# Altium PCB Pixel1.0_2.PcbDoc
Units mm, origin at the board's own origin, x right, y up, seen from the top; angles counter-clockwise.
Board outline 20.38 x 15.25 mm, 4 copper layers (Top, Route2, Route3, Bottom), stack 0.978 mm thick; 82 components, 63 nets, 251 pads, 127 vias.
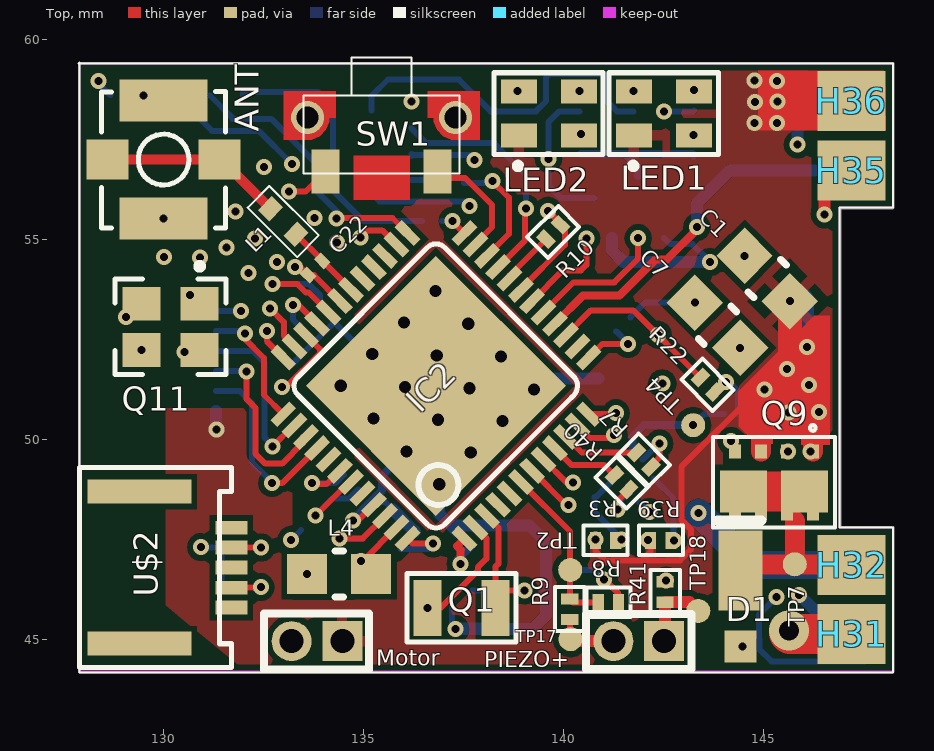
[diagram p0: Top view]
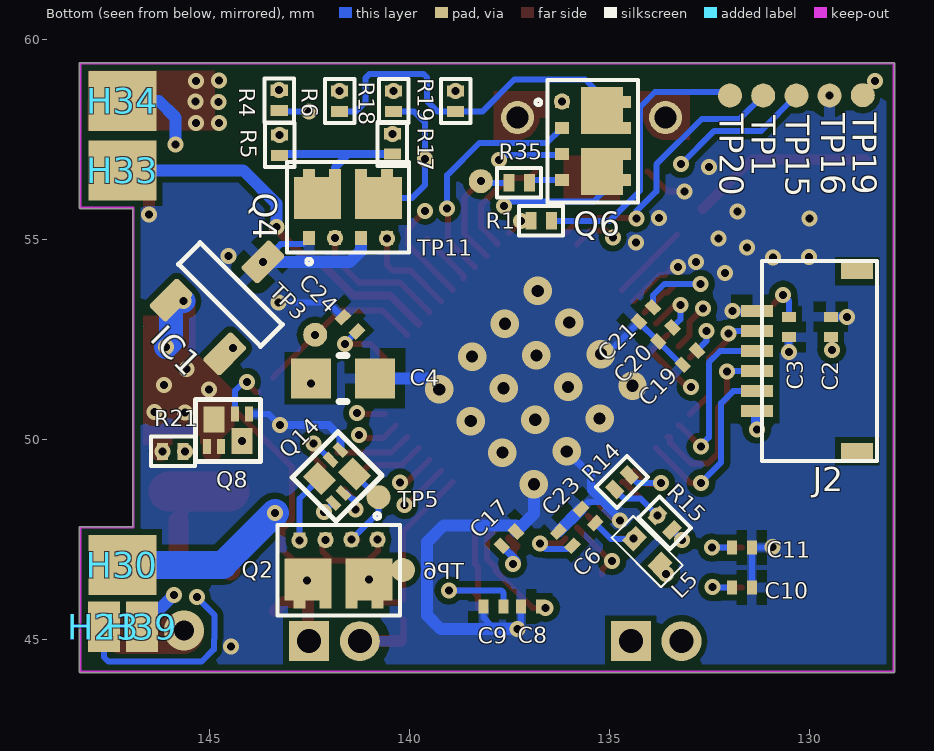
[diagram p1: Bottom view, seen from below]
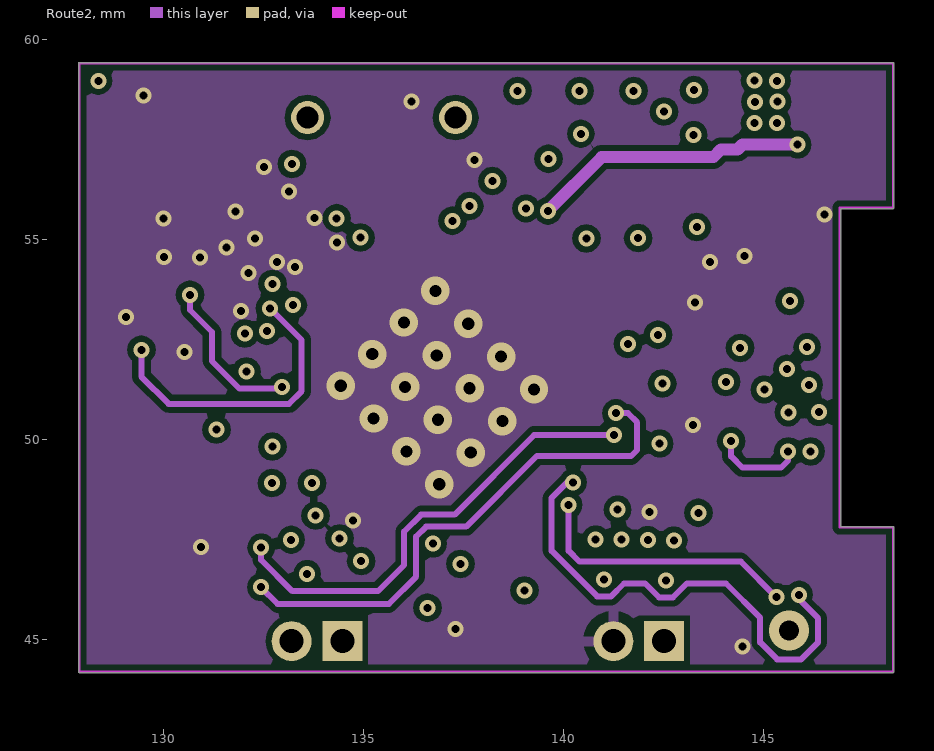
[diagram p2: Route2]
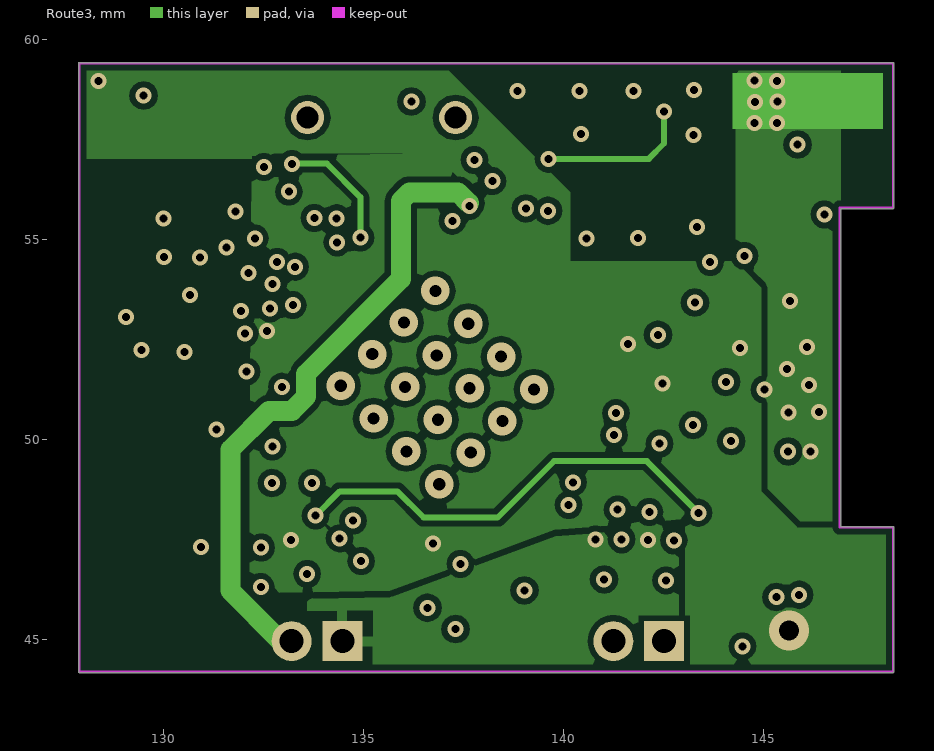
[diagram p3: Route3]
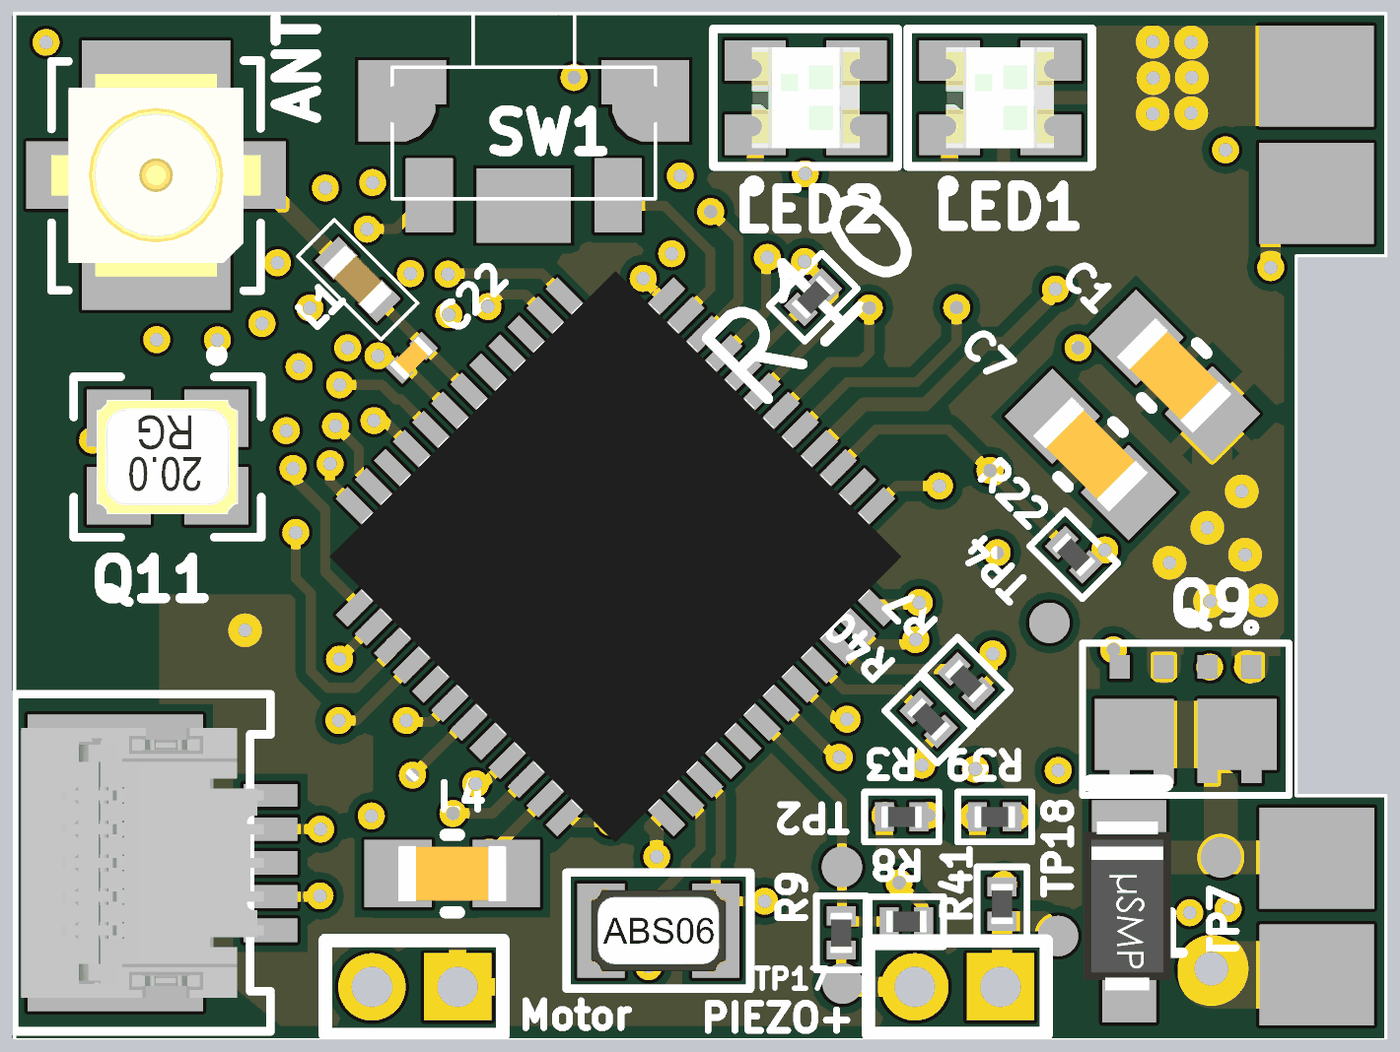
[diagram p4: 3D render of the assembled board from above, using the file's embedded part models]
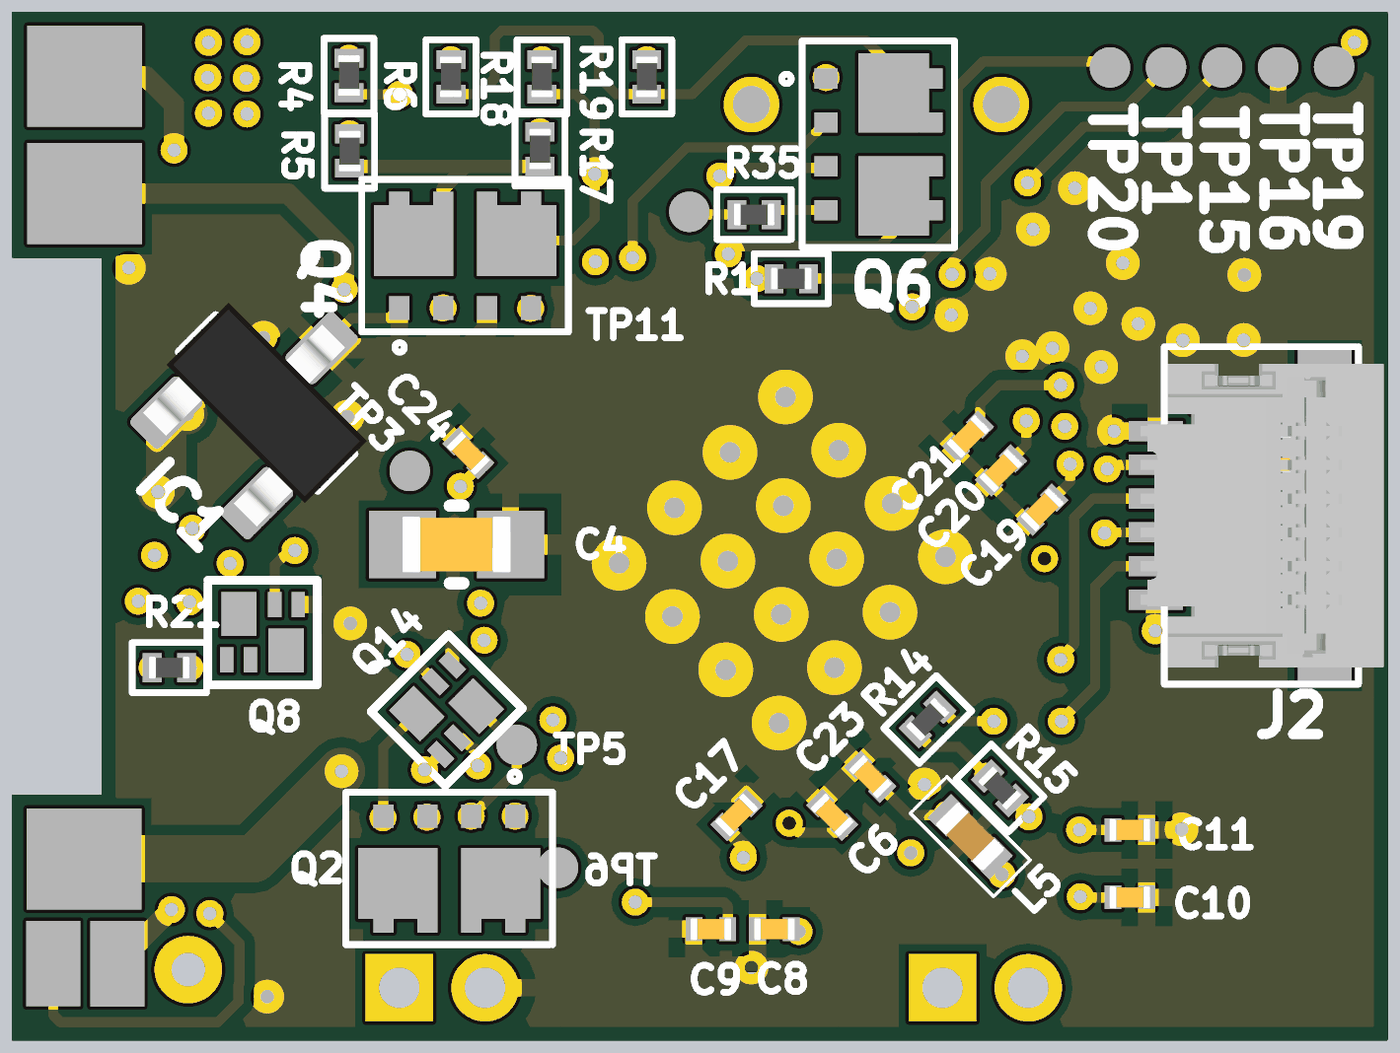
[diagram p5: 3D render of the assembled board from below, using the file's embedded part models]

## Layer stack, top to bottom
Top Solder: solder mask 0.0102, Solder Resist, Dk 3.5
Top: signal copper 0.0356
Dielectric 1: core 0.354, FR-4, Dk 4.2
Route2: signal copper 0.0356
Dielectric 2: prepreg 0.127, FR-4, Dk 4.2
Route3: signal copper 0.036
Dielectric 3: core 0.354, FR-4, Dk 4.2
Bottom: signal copper 0.0356
Bottom Solder: solder mask 0.0102, Solder Resist, Dk 3.5

## Board outline
127.874,44.2 127.874,59.4 cw(c127.9,59.4) 127.902,59.426 148.228,59.426 cw(c148.23,59.4) 148.256,59.4 148.256,55.8 cw(c148.23,55.8) 148.23,55.774 146.926,55.774 146.926,47.826 148.2,47.826 cw(c148.2,47.8) 148.215,47.821 cw(c148.23,47.8) 148.256,47.8 148.256,44.2 cw(c148.23,44.2) 148.228,44.174 127.902,44.174 cw(c127.9,44.2)

## Design rules (kind name [scope] priority, off if disabled: settings)
Clearance [All] p1: gap=0.15
ComponentClearance [All] p1 off: gap=0.2 collisioncheckmode=3 verticalgap=0.2 showdistances=FALSE
HoleSize [All] p1: absolutevalues=TRUE maxlimit=5 minlimit=0.025 maxpercent=80.000 minpercent=20.000
HoleToHoleClearance mdViaViaSameLayer [All] p1: gap=0.203 allowstackedmicrovias=TRUE
HoleToHoleClearance [All] p2: gap=0.254 allowstackedmicrovias=TRUE
MinimumSolderMaskSliver [All] p1 off: minsoldermaskwidth=0.254
NetAntennae [All] p1 off: netantennaetolerance=0
PlaneClearance [All] p1: clearance=0.254
PolygonConnect ThermalVias [IsVia] p1: connectstyle=Direct reliefconductorwidth=0.254 reliefentries=4 polygonreliefangle="90 Angle" airgapwidth=0.254
PolygonConnect [All] p2: connectstyle=Relief reliefconductorwidth=0.254 reliefentries=4 polygonreliefangle="90 Angle" airgapwidth=0.254
RoutingVias [All] p1: holewidth=0.2 width=0.4 viastyle="Through Hole" minholewidth=0.2 minwidth=0.4 maxholewidth=3 maxwidth=5
ShortCircuit [All] p1 off: allowed=FALSE
SilkToBoardRegionClearance [All] p1 off:
SilkToSilkClearance [All] p1 off: silktosilkclearance=0.254
SilkToSolderMaskClearance [IsPad] p1 off: minsilkscreentomaskgap=0.254 clearancetoexposedcopper=TRUE
SolderMaskExpansion via [isvia] p1: expansion=0 soldermaskfromhole=TRUE
SolderMaskExpansion [All] p2: expansion=0.05
Width [All] p1: maxlimit=3 minlimit=0.1 preferedwidth=0.15
20 further rules are at their usual default settings.

## Classes and differential pairs
component class Pixel1.0_0: ANT C2 C3 C6 C8 C9 C10 C11 C17 C19 C20 C21 C22 C23 C24 IC2 J2 L1 L4 L5 Q1 Q11 R1 TP1 TP15 TP16 TP19 TP20 U$2
component class Pixel1.0_2: C1 C4 C7 D1 H23 H30 H31 H32 H33 H34 H35 H36 H39 IC1 LED1 LED2 Motor PIEZO+ Q2 Q4 Q6 Q8 Q9 Q14 R3 R4 R5 R6 R7 R8 R9 R10 R14 R15 R17 R18 R19 R21 R22 R35 R39 R40 R41 SW1 TP2 TP3 TP4 TP5 TP6 TP7 TP11 TP17 TP18

## Components (designator, comment, footprint, x,y, rotation, side; value= is the part's Value field where it differs from the comment)
ANT "U.FL" U.FL 130,57 r90 top locked
C1 "1u" C0603 145.088,54.028 r315 top
C2 "12p" C0201 129.47,52.82 r90 bottom
C3 "12p" C0201 130.52,52.81 r90 bottom
C4 "1u" C0603 141.667,51.53 r0 bottom
C6 "4.7uF" C0201 136.103,47.522 r45 bottom
C7 "100n" C0603 143.848,52.858 r315 top
C8 "12pF" C0201 136.96,45.83 r0 bottom
C9 "12pF" C0201 137.9,45.83 r0 bottom
C10 "300pF" C0201 131.695,46.3 r180 bottom
C11 "300pF" C0201 131.695,47.3 r180 bottom
C17 "100nF" C0201 137.517,47.522 r135 bottom
C19 "100nF" C0201 132.992,52.047 r315 bottom
C20 "100pF" C0201 133.604,52.627 r135 bottom
C21 "N.C." C0201 134.09,53.13 r135 bottom
C22 "0.8pF" C0201 133.79,54.29 r225 top
C23 "1.0uF" C0201 135.537,48.087 r45 bottom
C24 "100nF" C0201 141.49,52.88 r45 bottom
D1 "MSS2P2" MICROSMP 144.42,46.08 r270 top
H23 "MOUNT-PAD-ROUND1.5MMX1MM" TMOUNT4#1 147.64,45.32 r90 bottom
H30 "MOUNT-PAD-ROUNDTMOUNT1" T-MOUNT1 147.182,46.87 r270 bottom
H31 "MOUNT-PAD-ROUNDTMOUNT1" T-MOUNT1 147.2,45.14 r90 top
H32 "MOUNT-PAD-ROUNDTMOUNT1" T-MOUNT1 147.202,46.87 r90 top
H33 "MOUNT-PAD-ROUNDTMOUNT1" T-MOUNT1 147.175,56.73 r270 bottom
H34 "MOUNT-PAD-ROUNDTMOUNT1" T-MOUNT1 147.175,58.47 r270 bottom
H35 "MOUNT-PAD-ROUNDTMOUNT1" T-MOUNT1 147.195,56.73 r90 top
H36 "MOUNT-PAD-ROUNDTMOUNT1" T-MOUNT1 147.195,58.47 r90 top
H39 "MOUNT-PAD-ROUND1.5MMX1MM" TMOUNT4#2 146.652,45.319 r270 bottom
IC1 "AP733-33SAG-7SOT23" SOT23 144.478,53.628 r225 bottom
IC2 "NRF52832" QFN-48 136.81,51.34 r45 top locked
J2 "FH34SRJ-6S-0.5SH(50)" 59453061110ECHLF 131.31,51.96 r90 bottom locked
L1 "3.9nH" JE0402 132.99,55.45 r135 top
L4 "10uH" C0603 134.39,46.64 r0 top
L5 "15nH" JE0402 134.06,47.2 r225 bottom
LED1 "HSMF-C114" HSMFC114 142.51,58.15 r90 top locked
LED2 "HSMF-C114" HSMFC114 139.63,58.15 r90 top
Motor "MHDR1X2" MHDR1X2 134.47,44.96 r180 top locked
PIEZO+ "MHDR1X2" MHDR1X2 142.515,44.96 r180 top locked
Q1 "FC-12M" FC-12M 137.445,45.795 r0 top
Q2 "SI5999" 1206-8CHIP-FET 141.775,46.73 r0 bottom locked
Q4 "SI5936" 1206-8CHIP-FET 141.54,55.81 r180 bottom locked
Q6 "SI5936" 1206-8CHIP-FET 135.42,57.46 r270 bottom locked
Q8 "BC847CDLP" X2-DFN1310-6 144.54,50.23 r0 bottom
Q9 "SI5999" 1206-8CHIP-FET 145.26,48.93 r180 top
Q11 "FA-128" FA-128 130.17,52.82 r180 top locked
Q14 "BC847CDLP" X2-DFN1310-6 141.815,49.08 r315 bottom
R1 "4.7K" R0201 136.71,55.47 r0 bottom
R3 "4.7K" R0201 141.05,47.48 r0 top
R4 "51" R0201 143.25,57.36 r90 bottom
R5 "51" R0201 143.26,58.48 r90 bottom
R6 "300" R0201 141.75,58.46 r90 bottom
R7 "4.7K" R0201 142.006,49.495 r315 top
R8 "27K" R0201 141.12,45.93 r0 top
R9 "18K" R0201 140.155,45.76 r90 top
R10 "15K" R0201 139.74,55.19 r45 top
R14 "2K" R0201 134.689,48.936 r135 bottom
R15 "402K" R0201 133.62,47.92 r45 bottom
R17 "51" R0201 140.43,57.39 r90 bottom
R18 "51" R0201 140.4,58.46 r90 bottom
R19 "300" R0201 138.85,58.46 r90 bottom
R21 "4.7K" R0201 145.92,49.705 r180 bottom
R22 "4.7K" R0201 143.6,51.37 r315 top locked
R35 "100" R0201 137.26,56.42 r180 bottom
R39 "4.7K" R0201 142.43,47.48 r0 top
R40 "4.7K" R0201 141.45,48.93 r315 top
R41 "1K" R0201 142.538,46.19 r270 top
SW1 "SW_SIDE_PUSH" SW1 135.45,58.05 r0 top locked
TP1 "TPTP06R" TP06R#1 131.16,58.6 r180 bottom
TP2 "TPTP06R" TP06R#1 140.165,46.74 r45 top
TP3 "TPTP06R" TP06R#1 142.36,52.62 r0 bottom
TP4 "TPTP06R" TP06R#1 143.24,50.36 r90 top
TP5 "TPTP06R" TP06R#1 140.775,48.56 r0 bottom
TP6 "TPTP06R" TP06R#2 140.165,46.74 r225 top
TP7 "TPTP06R" TP06R#1 145.78,46.882 r90 top
TP11 "TPTP06R" TP06R#1 138.22,56.46 r270 bottom
TP15 "TPTP06R" TP06R#1 130.33,58.6 r180 bottom
TP16 "TPTP06R" TP06R#1 129.5,58.6 r180 bottom
TP17 "TPTP06R" TP06R#1 140.175,45.01 r90 top
TP18 "TPTP06R" TP06R#1 143.368,45.715 r270 top
TP19 "TPTP06R" TP06R#3 128.67,58.6 r180 bottom
TP20 "TPTP06R" TP06R#1 131.99,58.6 r180 bottom
U$2 "NFCCONNECTORMOLEX_5PIN" NFC.CONN 129.395,46.8 r270 top locked

## Footprints (in the part's own frame and the unit in brackets; to place one, negate y for a bottom-side part, rotate by r counter-clockwise, add the part's x,y. Pads: shape width x height; smd on the part's side, far side on the other; paste and mask are expansions set on the pad)
1206-8CHIP-FET [mm] "1206-8CHIP-FET"
  rect 0.3x0.35 smd: 1(-0.975,-0.775) 2(-0.325,-0.775) 3(0.325,-0.775) 4(0.975,-0.775) 56(0.325,0.775) 56(0.975,0.775) 78(-0.975,0.775) 78(-0.325,0.775)
  rect 1.175x1.05 smd: 56(0.762,0.225) 78(-0.763,0.225)
  silkscreen extent -1.53,-1.43 1.53,1.13, body extent -1.39,-0.82 1.39,0.83, height 0.85
59453061110ECHLF [mm] "FPC/FFC SFVL Series, 6 Pos, Bottom Side Contact, Side Entry Surface Mount ZIF Connector, 0.5 mm (0.02 in.), Lead Free type, Short tail type"
  rect 0.3x0.8 smd: 1(-1.25,0) 2(-0.75,0) 3(-0.25,0) 4(0.25,0) 5(0.75,0) 6(1.25,0)
  rect 0.4x0.8 smd: 7(-2.25,-2.5) 8(2.25,-2.5)
  silkscreen extent -2.5,-3 2.5,-0.12, body extent -2.25,-3.37 2.25,0.23, height 0.9
C0201 [mm] "C0201"
  rect 0.25x0.35 smd: 1(-0.25,0) 2(0.25,0)
  body extent -0.36,-0.16 0.36,0.16, height 0.31
C0603 [mm] "0603_095"
  rect 1x1 smd: 1(-0.8,0) 2(0.8,0)
  silkscreen extent -0.1,-0.58 0.1,0.57, body extent -0.93,-0.41 0.93,0.41, height 0.81
FA-128 [mm] "FA-128"
  rect 0.95x0.85 smd: 1(-0.725,-0.575) 2(0.725,-0.575) 3(0.725,0.575) 4(-0.725,0.575)
  silkscreen extent -1.39,-1.54 1.39,1.19, body extent -1.05,-0.85 1.05,0.85, height 0.56
FC-12M [mm] "FC-12M"
  rect 0.7x1.4 smd: 1(-0.85,0) 2(0.85,0)
  silkscreen extent -1.36,-0.86 1.36,0.86, body extent -1,-0.61 1,0.61, height 0.6
HSMFC114 [mm] "HSMFC114"
  rect 0.6x0.9 smd: 1(-0.55,0.75) 2(0.55,0.75) 3(0.55,-0.75) 4(-0.55,-0.75)
  silkscreen extent -1.34,-1.36 1.02,1.37, body extent -0.75,-0.8 0.75,0.8, height 0.34
JE0402 [mm] "JE0402"
  rect 0.4x0.5 smd: 1(-0.45,0) 2(0.45,0)
  silkscreen extent -0.87,-0.38 0.87,0.38, body extent -0.5,-0.25 0.5,0.25, height 0.5
MHDR1X2 [mm] "Connector; Header; 2 Position"
  rect 1x1 hole 0.6: 1(0,0)
  round 1 hole 0.6: 2(1.27,0)
  silkscreen extent -0.67,-0.69 1.96,0.71
MICROSMP [mm] "MICROSMP"
  rect 0.8x0.8 smd: A(1.25,0)
  rect 2x1.1 smd: K(-0.65,0)
  silkscreen extent -1.9,-0.57 -1.9,0.53, body extent -1.33,-0.68 1.17,0.62, height 0.66
NFC.CONN [mm] "NFC.CONN"
  rect 0.34x0.8 smd: 1(-1,2.3) 4(0.5,2.3)
  rect 0.35x0.8 smd: 2(-0.5,2.3) 3(0,2.3) 5(1,2.3)
  rect 0.6x2.6 smd: P$1(1.9,0) P$2(-1.9,0)
  silkscreen extent -2.5,-1.5 2.5,2.3, body extent -2,-1.4 2,2.2, height 0.9
QFN-48 [mm] "QFN-48"
  rect 0.245x0.68 smd: 1(-2.2,-3.2) 2(-1.8,-3.2) 3(-1.4,-3.2) 4(-1,-3.2) 5(-0.6,-3.2) 6(-0.2,-3.2) 7(0.2,-3.2) 8(0.6,-3.2) 9(1,-3.2) 10(1.4,-3.2) 11(1.8,-3.2) 12(2.2,-3.2) 25(2.2,3.2) 26(1.8,3.2) 27(1.4,3.2) 28(1,3.2) 29(0.6,3.2) 30(0.2,3.2) 31(-0.2,3.2) 32(-0.6,3.2) 33(-1,3.2) 34(-1.4,3.2) 35(-1.8,3.2) 36(-2.2,3.2)
  rect 0.68x0.245 smd: 13(3.2,-2.2) 14(3.2,-1.8) 15(3.2,-1.4) 16(3.2,-1) 17(3.2,-0.6) 18(3.2,-0.2) 19(3.2,0.2) 20(3.2,0.6) 21(3.2,1) 22(3.2,1.4) 23(3.2,1.8) 24(3.2,2.2) 37(-3.2,2.2) 38(-3.2,1.8) 39(-3.2,1.4) 40(-3.2,1) 41(-3.2,0.6) 42(-3.2,0.2) 43(-3.2,-0.2) 44(-3.2,-0.6) 45(-3.2,-1) 46(-3.2,-1.4) 47(-3.2,-1.8) 48(-3.2,-2.2)
  rect 4.6x4.6 smd: 45(0,0)
  silkscreen extent -2.6,-2.6 2.6,2.6, body extent -3.02,-3.02 3.02,3.02, height 0.86
R0201 [mm] "R0201"
  rect 0.28x0.43 smd: 1(-0.255,0) 2(0.255,0)
  silkscreen extent -0.55,-0.37 0.55,0.37, body extent -0.32,-0.16 0.33,0.16, height 0.24
SOT23 [mm] "SOT23"
  round 0.5 on Mech15: 0(0,0)
  rrect25% 0.6x1 smd: 1(-0.95,-1.15) 2(0.95,-1.15) 3(0,1.15)
  silkscreen extent -1.45,-0.38 1.45,0.38, body extent -1.45,-1.4 1.45,1.4, height 1.29
SW1 [mm] "SW1"
  rrect3% 0.7x1.1 smd: 1(-1.4,-1.35) 2(1.4,-1.35)
  round 0.825 hole 0.55: P$1(-1.85,0) P$2(1.85,0)
  Top region: -0.7,-0.95 0.7,-0.95 0.7,-2.05 -0.7,-2.05
  Top region: -0.7,-0.95 0.7,-0.95 0.7,-2.05 -0.7,-2.05
  Top region: -1.15,0 -1.15,0.66 -2.45,0.66 -2.45,-0.55 -1.85,-0.55 -1.741,-0.549 -1.542,-0.464 -1.39,-0.309 -1.309,-0.108 -1.31,0 -1.31,0
  Top region: 1.15,0.66 2.45,0.66 2.45,-0.55 1.85,-0.55 1.741,-0.549 1.542,-0.464 1.39,-0.309 1.309,-0.108 1.31,0 1.31,0 1.15,0
  silkscreen extent -1.95,-1.4 1.95,1.5
T-MOUNT1 [mm] "T-MOUNT1"
  rect 1.5x1.7 smd: 1(0,0)
TMOUNT4#1 [mil] "TMOUNT4"
  rect 50x31.5 smd: 1(0,0)
TMOUNT4#2 [mil] "TMOUNT4"
  rect 50x31.5 smd: 1(0,-1.5)
TP06R#1 [mm]
  round 0.6 smd: TP(0,0)
TP06R#2 [mm]
  round 0.6 smd far side: TP(0,0)
TP06R#3 [mm]
  round 0.6 smd: TP(0,0.01)
U.FL [mm] "U.FL"
  rect 1.05x2.2 smd: GND(-1.475,0) GND(1.475,0)
  rect 1x1.05 smd: SIG(0,1.397) SIG(0,-1.398)
  silkscreen extent -1.71,-1.55 1.7,1.55, body extent -1.5,-1.55 1.5,1.55, height 1.3
X2-DFN1310-6 [mm] "X2-DFN1310-6"
  rect 0.2x0.375 smd: B1(-0.18,-0.407) B2(0.18,0.407) E1(-0.53,-0.407) E2(0.53,0.407)
  rect 0.52x0.65 smd: C1(-0.35,0.27) C2(0.35,-0.27)
  silkscreen extent -0.81,-0.77 0.81,0.78, body extent -0.65,-0.5 0.65,0.5, height 0.42

## Part data
C1 C4 C7: library part C-EUC0603, "CAPACITOR, European symbol"
C2 C3 C6 C8 C9 C10 C11 C17 C19 C20 C21 C22 C23 C24: library part C-EUC0201, "CAPACITOR, European symbol"
H23 H30 H31 H32 H33 H34 H35 H36 H39: "MOUNTING PAD, round"
J2: library part "WE-ZIF Connector WR-FPC 68710614522", "WR-FPC 0.50mm SMT ZIF Horizontal Bottom Contact"
L1 L4 L5: library part LBEAD
LED1 LED2: "Chip LED RGB   Source: http://document.sharpsma.com/files/GM1WA55311A_SS.pdf"
Motor PIEZO+: "Header, 2-Pin"
Q1: "kHz RANGE CRYSTAL UNIT   LOW PROFILE SMDSource: Epson Toyocom FC-12M.pdf"
Q2 Q9: "Dual N-Channel 30-V (D-S) MOSFET   Source: http://www.vishay.com/docs/71053/71053.pdf"
Q8 Q14: "http://www.diodes.com/datasheets/ds30817.pdf"
Q11: "MHz RANGE CRYSTAL UNIT    Source: Epson Toyocom"
R1 R3 R4 R5 R6 R7 R8 R9 R10 R14 R15 R17 R18 R19 R21 R22 R35 R39 R40 R41: library part R-US_R0201, "RESISTOR, American symbol"
TP1 TP2 TP3 TP4 TP5 TP6 TP7 TP11 TP15 TP16 TP17 TP18 TP19 TP20: "Test pad"

## Via types
v1: diameter 0.4, hole 0.2, Top to Bottom, 110 vias
v2: diameter 0.711, hole 0.305, Top to Bottom, 16 vias
v3: diameter 1, hole 0.5, Top to Bottom, 1 vias

## Nets (pads, with @x,y where several pads share a name; then routed paths per layer and width w, separated by ;. In a path a pad name is that pad's centre, name@x,y a point inside that pad or via, vN(x,y) a via of type N, cw(c..) or ccw(c..) an arc to the next point about the centre after c; other vN are vias at no path point)
ATOMIZER: IC2.15 R22.1 TP3.TP | length 4.3
  Top w0.15: IC2.15 140.68,53.23 141.74,53.23 R22.1
  other v1: 142.36,52.62
ATOMIZER+: D1.K H32.1 Q9.56 Q9.78 TP7.TP | length 5.7
  Top w0.15: Q9.78@145.585,48.155 145.78,47.96 ; H32.1@147.19,46.882 H32.1
  Top w0.5: D1.K@144.48,46.73 144.632,46.882 TP7.TP ; 145.78,47.96 TP7.TP ; H32.1@147.19,46.882 TP7.TP
  Top w1: Q9.56@144.497,48.705 Q9.78@146.023,48.705
ATOMIZER_BUTTON: IC2.23 SW1.2 | length 2.9
  Top w0.15: SW1.2 137.005,56.545 137.534,56.545 138.209,55.87 138.215,55.87 138.215,55.315 137.8,54.9 IC2.23
B_CH1: IC2.17 Q4.2 | length 3.9
  Top w0.15: IC2.17 140.248,53.93 141.27,53.93 141.865,54.525 ; 141.865,54.525 v1(141.865,55.035) 141.865,54.525
B_CH2/MOSI: IC2.38 J2.4 | length 4.3
  Top w0.15: v1(132.72,49.823) 133.248,50.35 IC2.38
  Bottom w0.15: J2.4 132.24,52.21 132.52,51.93 132.52,50.055 v1@132.753,49.823
BAT+: C1.2 H36.1 IC1.1 J2.1 LED1.1 LED2.1 Motor.1 Q2.1 Q2.3 Q9.1 Q9.3 R3.1 R21.1 R39.1 | length 13.8
  Top w0.15: R3.1 140.795,47.215 141.03,46.98 141.96,46.98 ; R39.1 142.175,47.195 141.96,46.98 ; v1(145.02,51.25) 144.879,51.25 142.945,49.316 142.945,47.994 143.18,47.759 143.18,47.25 142.91,46.98 141.96,46.98
  Top w0.5: Q9.3 144.935,50.355 ; Q9.1 146.235,50.495
  Top w0.6: 144.935,50.355 144.96,50.38 ; v1(145.58,51.77) 145.654,51.844 v1(145.654,53.462)
  Bottom w0.15: v1@131.31,50.26 v1(131.32,50.25) ; v1(140.8,47.505) Q2.1@140.8,47.57 ; Q2.3 142.105,47.5 Q2.3@142.105,47.48
  Bottom w0.3: v1@131.31,50.26 J2.1
  Bottom w0.6: v1(145.654,53.462) 145.678,53.486 IC1.1 145.963,52.437 v1(146.09,52.31)
  other v1: 142.105,47.49 146.175,49.705 145.62,50.68 146.38,50.69 146.14,51.37 144.77,57.91 145.34,57.92 144.78,58.44 145.35,58.45 144.77,58.98 145.34,58.97
BAT_SENSE: IC2.6 R8.1 R9.2 TP2.TP | length 4.2
  Top w0.15: IC2.6 140.165,47.702 TP2.TP 140.165,46.015 R9.2@140.16,46.01 ; R9.2 R9.2@140.16,46.01 ; R8.1 140.24,45.93 R9.2@140.16,46.01
BAT_SENSE_EN: IC2.10 R7.1 | length 1.9
  Top w0.15: IC2.10 140.454,49.676 R7.1@141.795,49.676
BUZZER: IC2.9 R40.1 | length 1.8
  Top w0.15: IC2.9 140.194,49.37 141.01,49.37 R40.1
CARTRIDGE_EN: IC2.20 R10.1 | length 1.4
  Top w0.15: IC2.20 138.648,54.098 R10.1
CARTRIDGE_SENSE/SDA: H34.1 IC2.19 R10.2 | length 11.7
  Top w0.15: IC2.19 138.931,53.759 140.036,54.863 140.036,55.255 R10.2 139.92,55.41 v1(139.61,55.72)
  Route2 w0.3: v1(139.61,55.72) 140.95,57.06 143.743,57.06 143.933,57.25 144.347,57.25 144.472,57.375 v1(145.85,57.375)
  Bottom w0.3: v1(145.85,57.375) 145.85,58.05 146.27,58.47 H34.1
G_CH1: IC2.18 Q4.4 | length 2.4
  Top w0.15: IC2.18 139.983,54.23 140.43,54.23 140.57,54.37 v1(140.57,55.03)
G_CH2/SS: IC2.40 J2.2 | length 4.7
  Top w0.15: v1(132.71,48.91) 132.966,48.91 IC2.40
  Bottom w0.15: J2.2 131.91,51.21 132.21,50.91 132.21,49.43 v1@132.71,48.93
GND: ANT.GND C1.1 C2.2 C3.1 C4.1 C6.2 C7.1 C8.2 C9.2 C10.2 C11.2 C17.2 C19.2 C20.1 C21.1 C22.2 C23.2 C24.2 D1.A H35.1 IC1.3 IC2.31 IC2.45 J2.6 PIEZO+.2 Q4.1 Q4.3 Q6.1 Q6.3 Q8.E1 Q11.2 Q11.4 Q14.E1 Q14.E2 R9.1 SW1.1 TP4.TP TP16.TP TP17.TP | length 38.4
  Top w0.15: v1(133.13,56.2) 133.55,56.2 SW1.1 ; v1(133.29,54.32) 133.407,54.32 C22.2 133.754,54.113 IC2.31 ; v1(134.737,47.973) 134.857,47.973 IC2.45@135.254,48.37 ; R9.1 140.155,45.03 TP17.TP TP17.TP@140.225,44.96
  Top w0.3: TP17.TP@140.225,44.96 PIEZO+.2 ; v1(146.52,55.63) 146.52,56.055 H35.1
  Bottom w0.15: v1(129.06,53.07) C2.2 ; v1(130.52,52.19) C3.1 ; v1@130.96,47.31 130.95,47.3 C11.2 C10.2 ; J2.6 v1(131.93,53.21) ; C19.2 133.201,51.87 C20.1 134.267,52.936 135.067,52.137 v2(135.217,52.137) ; 135.172,48.442 135.536,48.442 C23.2 ; Q6.3@136.195,57.095 Q6.3@136.195,57.113 ; Q6.3 Q6.3@136.195,57.113 ; Q6.1@136.195,58.395 v1(136.195,58.45) ; C8.2 137.21,45.35 v1(137.3,45.26) 137.3,45.35 137.95,45.35 138.15,45.55 C9.2 ; v1@137.72,57.05 v1@137.73,57.04 ; v1(137.77,56.99) 137.647,57.113 Q6.3@136.195,57.113 ; C24.2 142.033,53.423 v1(143.283,53.423) ; Q14.E2 141.913,48.417 v1(142.142,48.19) v1(142.142,48.19) ; Q4.1 142.665,54.885 143.221,54.885 v1(143.665,54.441) ; v1(143.24,50.36) 143.517,50.637 Q8.E1
  Bottom w0.2: v1@134.74,48.01 135.172,48.442 135.46,48.73 135.46,49.095 v2(136.069,49.705) ; Q14.E1 141.728,50.078 142.01,50.36 v1(143.24,50.36)
  Bottom w0.3: C23.2 C6.2 ; v2(136.891,48.884) 136.891,48.148 C17.2 137.34,47.857 139.143,47.857 139.565,47.435 139.565,45.605 139.22,45.26 v1(137.3,45.26) ; v2(139.259,51.252) 139.537,51.53 C4.1 ; Q4.3 141.215,54.723 141.498,54.44 v1(143.665,54.441)
  other v1: 144.47,44.83 130.93,47.31 132.12,54.16 132.84,54.44 130.01,54.56 130.91,54.557 144.523,54.593 131.57,54.8 134.34,54.93 132.28,55.03 130,55.525 133.77,55.54 131.8,55.7 132.51,56.81 129.5,58.6
  other v2: 137.68,49.673 138.47,50.463 136.859,50.494 135.248,50.526 137.649,51.284 136.038,51.315 134.427,51.347 138.438,52.074 136.827,52.105 137.617,52.895 136.006,52.926 136.796,53.716
MOTOR: IC2.22 R35.1 TP11.TP | length 3
  Top w0.15: IC2.22 138.63,55.14 138.63,56.05 v1(138.22,56.46)
  Bottom w0.15: R35.1 138.18,56.42 v1(138.22,56.46)
NetC2_1: C2.1 IC2.35 Q11.3 | length 9
  Top w0.15: v1(132.66,53.28) 133.005,52.935 133.005,52.599 IC2.35
  Route2 w0.15: v1(129.445,52.245) 129.445,51.575 130.125,50.895 133.136,50.895 133.45,51.209 133.45,52.49 v1(132.66,53.28)
  Bottom w0.15: v1(129.445,52.245) 129.445,52.545 C2.1
NetC3_2: C3.2 IC2.34 Q11.1 | length 6.8
  Top w0.15: v1(130.66,53.62) 130.67,53.62 Q11.1 ; v1(132.96,51.32) 133.07,51.32 133.91,52.16 133.91,52.26 IC2.34
  Route2 w0.15: v1(130.66,53.62) 130.66,53.24 131.21,52.69 131.21,51.959 131.894,51.275 132.915,51.275 v1(132.96,51.32)
  Bottom w0.15: C3.2 130.52,53.48 v1(130.66,53.62)
NetC8_1: C8.1 IC2.2 Q1.1 | length 2.9
  Top w0.15: v1(136.595,45.795) 136.927,45.795 137.855,46.723 137.855,46.805 138.069,47.019 138.069,47.535 IC2.2
NetC9_1: C9.1 IC2.3 Q1.2 | length 5
  Top w0.15: IC2.3 138.369,47.801 138.369,46.895 138.295,46.821 Q1.2@138.295,46.085 ; Q1.2 Q1.2@138.295,46.085 ; v1(139.02,46.23) 138.44,46.23 Q1.2@138.295,46.085
  Bottom w0.15: C9.1 137.65,46.17 137.71,46.23 138.368,46.23 v1(139.02,46.23)
NetC17_1: C17.1 IC2.1 | length 1.3
  Top w0.2: v1(137.42,46.89) 137.42,47.225 137.43,47.235 137.33,47.335 IC2.1
  Bottom w0.2: v1@137.33,46.981 C17.1
NetC20_2: C20.2 IC2.33 | length 1.4
  Top w0.15: v1(133.23,53.36) 133.376,53.36 IC2.33
  Bottom w0.15: v1(133.23,53.36) 133.23,53.001 C20.2
NetC21_2: C21.2 IC2.32 | length 3.3
  Top w0.15: v1(132.722,53.89) 133.342,53.89 133.555,53.676 133.625,53.676 IC2.32
  Bottom w0.15: v1(132.722,53.89) 133.63,53.89 133.913,53.607 C21.2
NetC22_1: C22.1 IC2.30 L1.1 | length 2
  Top w0.15: L1.1 133.987,54.453 133.987,54.446 IC2.30
NetC23_1: C23.1 IC2.46 L5.1 | length 2.5
  Top w0.15: v1(134.4,47.532) 134.962,47.532 134.97,47.54 134.98,47.53 IC2.46
  Bottom w0.15: L5.1 134.968,47.518 C23.1
NetIC2_24: IC2.24 R1.2 | length 0.7
  Top w0.15: v1(137.22,55.47) 137.22,55.456 IC2.24
  Bottom w0.15: R1.2 v1@137.22,55.47
NetIC2_47: IC2.47 L4.2 | length 1.6
  Top w0.15: L4.2 135.19,46.746 134.976,46.96 IC2.47
  other v1: 134.94,46.96
NetL4_1: L4.1 L5.2 | length 0.3
  Bottom w0.15: v1(133.59,46.64) 133.742,46.792 L5.2
NetLED1_2: LED1.2 R6.2
  other v1: 141.75,58.715
NetLED1_3: LED1.3 R5.2 | length 0
  Top w0.15: LED1.3 v1(143.26,58.735)
NetLED1_4: LED1.4 R4.2
  other v1: 143.25,57.615
NetLED2_2: LED2.2 R19.2 | length 0
  other v1: 138.85,58.715
NetLED2_3: LED2.3 R18.2 | length 0
  Top w0.15: LED2.3@140.38,58.69 140.38,58.695 v1(140.4,58.715)
NetLED2_4: LED2.4 R17.2
  other v1: 140.43,57.645
NetMotor_2: Motor.2 Q6.56 | length 18.9
  Route3 w0.5: Motor.2 132.931,44.96 131.67,46.221 131.67,49.751 132.638,50.72 133.208,50.72 133.56,51.071 133.56,51.641 135.93,54.011 135.93,55.962 136.148,56.18 137.36,56.18 v1@137.63,55.91
  Bottom w0.15: Q6.56@135.195,56.698 135.195,56.155 135.4,55.95 137.528,55.95 v1(137.643,55.835)
NetQ2_2: Q2.2 Q14.C1 R3.2 TP5.TP | length 2.3
  Top w0.15: R3.2 141.33,47.505 v1(141.45,47.505)
  Bottom w0.15: Q14.C1 140.8,48.56 TP5.TP 140.775,48.18 v1(141.45,47.505)
NetQ2_4: Q2.4 Q14.C2 R39.2 | length 1.8
  Bottom w0.15: Q14.C2 142.75,48.526 Q2.4 142.71,47.505 Q2.4@142.685,47.48
  other v1: 142.755,47.48
NetQ2_56: Q2.56 R41.1
  other v1: 142.56,46.48
NetQ2_78: Q2.78 R8.2 TP6.TP | length 1.7
  Top w0.15: v1(141.013,46.505) 141.375,46.142 R8.2
  Bottom w0.15: TP6.TP 140.777,46.74 v1(141.013,46.505)
NetQ4_56: Q4.56 R5.1 R18.1 | length 8.4
  Route3 w0.15: v1(139.62,57.02) 142.13,57.02 142.51,57.4 v1(142.51,58.2)
  Bottom w0.15: R18.1 139.895,58.205 139.62,57.93 v1(139.62,57.02) 139.62,56.36 139.945,56.035 Q4.56@140.777,56.035 ; v1(142.51,58.2) 143.235,58.2 R5.1
NetQ4_78: Q4.78 R4.1 R17.1 | length 3.5
  Bottom w0.2: R17.1 141.535,57.135 ; Q4.78@141.865,56.585 141.865,56.805 141.535,57.135 ; R4.1 143.22,57.135 141.535,57.135
NetQ6_4: Q6.4 R35.2 | length 0.8
  Bottom w0.15: Q6.4 136.96,56.485 R35.2@137.005,56.44
NetQ6_78: Q6.78 R6.1 R19.1 | length 8.9
  Bottom w0.15: Q6.78@135.195,58.223 135.195,58.585 135.61,59 137.38,59 138.175,58.205 R19.1 139.305,58.205 139.56,58.46 139.56,59.05 139.655,59.145 140.998,59.145 141.1,59.043 141.1,58.44 141.335,58.205 R6.1
NetQ8_B1: Q8.B1 R22.2 | length 1.4
  Top w0.15: R22.2 143.85,51.19 v1@144.12,51.46
  Bottom w0.15: v1@144.125,51.46 144.36,51.225 Q8.B1
  other v1: 144.06,51.44
NetQ8_C1: Q8.C1 Q9.2 Q9.4 R21.2 | length 2.6
  Top w0.15: v1(144.19,49.96) 144.285,49.865 Q9.4 ; Q9.2 v1(145.615,49.705) Q9.2@145.665,49.705
  Route2 w0.15: v1(144.19,49.96) 144.19,49.58 144.47,49.3 145.44,49.3 145.615,49.475 v1(145.615,49.705)
NetQ14_B1: Q14.B1 R7.2 | length 1.2
  Top w0.15: R7.2@142.156,49.315 142.4,49.559 v1(142.4,49.9)
  Bottom w0.15: Q14.B1 v1@142.371,49.89
NetQ14_B2: Q14.B2 R40.2 | length 1.2
  Top w0.15: v1(141.35,48.25) 141.35,48.469 R40.2
  Bottom w0.15: v1(141.35,48.25) 141.35,48.469 141.379,48.498 141.424,48.498 141.591,48.664 Q14.B2
NFC1: C10.1 IC2.12 U$2.4 | length 15
  Top w0.15: U$2.4 132.42,46.3 v1(132.43,46.31) ; IC2.12 141.283,50.633 v1(141.31,50.66)
  Route2 w0.15: v1(132.43,46.31) 132.85,45.89 135.63,45.89 136.315,46.575 136.315,47.576 136.564,47.825 137.565,47.825 139.33,49.59 141.69,49.59 141.84,49.74 141.84,50.43 141.61,50.66 v1(141.31,50.66)
  Bottom w0.15: C10.1 132.42,46.3 v1(132.43,46.31)
NFC2: C11.1 IC2.11 U$2.2 | length 13.9
  Top w0.15: U$2.2 v1(132.44,47.3) ; IC2.11 140.656,50.04 141.19,50.04 v1(141.26,50.11)
  Route2 w0.15: v1(132.44,47.3) 132.44,46.99 133.22,46.21 135.36,46.21 136.015,46.865 136.015,47.7 136.439,48.125 137.275,48.125 139.26,50.11 v1(141.26,50.11)
  Bottom w0.15: C11.1 v1(132.44,47.3)
P0_0: IC2.41
P1_5: IC2.42 R14.2 | length 1.7
  Top w0.15: v1@133.73,48.89 134.077,48.89 IC2.42
  Bottom w0.15: v1(133.71,48.91) 134.302,48.91 R14.2
P2_1/DD/BLESW: IC2.37 J2.5 | length 3.2
  Top w0.15: v1@132,52.71 132,52.547 132.51,52.037 132.51,51.115 IC2.37
  Bottom w0.15: J2.5 v1@132,52.71
  other v1: 132.03,52.65
P2_2/DC/!CHARGE: H30.1 IC2.43 R14.1 R15.2 | length 18.1
  Top w0.15: v1(133.8,48.1) 134.636,48.936 IC2.43
  Route3 w0.15: v1(133.8,48.1) 134.407,48.707 135.843,48.707 136.5,48.05 138.35,48.05 139.76,49.46 142.08,49.46 v1(143.37,48.17)
  Bottom w0.15: v1(133.8,48.1) 134.23,48.53 134.643,48.53 R14.1
  Bottom w0.7: v1(143.37,48.17) 144.67,46.87 H30.1
PIEZO+: PIEZO+.1 R41.2 TP18.TP | length 1.9
  Top w0.3: PIEZO+.1 142.538,44.982 R41.2 143.147,45.935 TP18.TP
R_CH1: IC2.21 Q6.2 | length 6
  Top w0.15: IC2.21 139.04,54.984 v1@139.04,55.8
  Bottom w0.15: Q6.2 136.568,57.413 137.591,57.413 137.594,57.415 138.255,57.415 139.06,56.61 v1(139.06,55.78)
R_CH2/C: IC2.39 J2.3 | length 4.6
  Top w0.15: v1@132.07,51.71 132.07,51.02 132.295,50.795 132.295,49.647 132.544,49.398 132.962,49.398 133.483,49.919 133.483,50.067 IC2.39
  Bottom w0.15: J2.3 v1@132.07,51.71
  other v1: 132.07,51.7
RESET_N: R1.1 TP20.TP | length 7.1
  Bottom w0.15: TP20.TP 131.99,58.687 133.864,58.687 134.24,58.312 134.24,56.222 134.992,55.47 R1.1
RF: ANT.SIG L1.2 | length 4.5
  Top w0.254: ANT.SIG@128.603,57 ANT.SIG@131.398,57 ; ANT.SIG@131.44,57 L1.2
RXD: H23.1 IC2.7 | length 13.3
  Top w0.15: IC2.7 140.068,48.365 v1(140.125,48.365)
  Route2 w0.15: v1(140.125,48.365) 140.125,47.219 140.394,46.95 144.43,46.95 v1(145.32,46.06)
  Bottom w0.15: v1(145.32,46.06) 144.88,45.62 144.88,45.021 144.895,45.006 144.895,44.755 145.2,44.45 147.53,44.45 147.64,44.561 H23.1
SCL: H33.1 IC2.16 | length 9.3
  Top w0.2: IC2.16 140.484,53.6 141.4,53.6 142.3,54.5 142.58,54.5 v1@143.36,55.28
  Bottom w0.3: v1(143.33,55.31) 143.33,55.9 144.16,56.73 H33.1
SWDCLK: IC2.25 TP1.TP | length 6.9
  Top w0.15: v1(134.328,55.532) 134.335,55.54 135.721,55.54 IC2.25
  Bottom w0.15: TP1.TP 131.73,58.03 ; 131.72,58.02 132.69,58.02 133.83,56.88 133.83,56.207 134.343,55.695 v1@134.343,55.547
SWDIO: IC2.26 TP15.TP | length 7.8
  Top w0.15: v1(134.92,55.05) 135.1,55.23 135.466,55.23 IC2.26
  Route3 w0.15: v1@133.23,56.9 134.08,56.9 134.92,56.06 v1(134.92,55.05)
  Bottom w0.15: TP15.TP 131.21,57.72 132.38,57.72 v1(133.21,56.89) ; v1@133.23,56.9 v1@133.23,56.98
TXD: H39.1 IC2.8 | length 14.4
  Top w0.15: IC2.8 140.069,48.93 v1(140.24,48.93)
  Route2 w0.15: v1(140.24,48.93) 140.089,48.93 139.7,48.541 139.7,47.216 140.837,46.08 141.189,46.08 141.509,46.4 142.039,46.4 142.384,46.055 142.736,46.055 143.081,46.4 144.06,46.4 144.915,45.545 144.915,44.93 145.339,44.505 145.94,44.505 146.365,44.93 146.365,45.53 145.889,46.006 v1(145.889,46.12)
  Bottom w0.3: v1(145.889,46.12) H39.1
VDD: C4.2 C6.1 C7.2 C19.1 C24.1 H31.1 IC1.2 IC2.13 IC2.36 IC2.48 R15.1 TP19.TP | length 7
  Top w0.15: v1(132.58,52.72) 132.58,52.459 IC2.36 ; IC2.48 136.225,47.4 v1(136.74,47.4) ; IC2.13 140.971,52.39 v1(141.61,52.39)
  Top w1: v3@145.64,45.16 145.66,45.14 H31.1
  Bottom w0.15: v1(128.37,58.97) 128.37,58.91 TP19.TP ; v1(132.58,52.72) 132.58,52.459 C19.1 C19.1@132.834,52.224 ; v1@133.21,47.53 133.23,47.53 R15.1 ; C6.1 135.926,47.261 136.601,47.261 v1(136.74,47.4) ; C24.1 141.61,52.407 v1(141.61,52.39)
  other v1: 133.19,47.495 142.467,51.4 144.414,52.292
  other v3: 145.64,45.23
pads on no net: IC1.0 IC2.4 IC2.5 IC2.14 IC2.27 IC2.28 IC2.29 IC2.44 J2.7 J2.8 Q8.B2 Q8.C2 Q8.E2 SW1.P$1 SW1.P$2 U$2.1 U$2.3 U$2.5 U$2.P$1 U$2.P$2

## Polygon pours and split planes (outlines as drawn)
BAT+ on Top "Top_BAT+" (solid, remove dead copper, pour order 10): 144.059,59.23 144.029,59.2 137.12,59.23 137.12,55.151 144.065,55.151 144.87,55.151 144.87,56.76 144.87,59.23
BAT+ on Top "TOP_BAT+" (solid, remove dead copper, pour order 2): 134.776,44.2 146.86,44.174 146.86,49.35 146.926,57.68 148.256,57.68 148.256,59.4 134.776,59.426
BAT+ on Top "TOP_BAT+" (solid, remove dead copper, pour order 4): 130.05,47.59 130.05,45.86 131.83,44.4 131.96,44.27 135.9,44.27 135.9,45.94 135.9,45.98 133.22,45.98 133.22,49.21 132.05,50.78 130.05,50.78
BAT+ on Top "Route2_BAT" (solid, remove dead copper, pour order 22): 144.05,51.049 143.389,51.049 140.38,48.04 140.09,47.75 139.79,47.75 139.79,44.26 139.91,44.14 139.97,44.2 144.97,44.2 144.97,47.313 145.377,47.72 146.367,48.71 146.93,48.71 146.93,52.63 146.721,52.839 144.971,51.089 144.09,51.089 143.511,51.089 143.49,51.11
GND on Route2 "Route2_GND" (solid, remove dead copper, pour order 6): 127.874,59.4 127.9,59.426 148.228,59.426 148.228,55.776 148.23,55.774 146.926,55.774 146.926,47.826 146.931,47.821 148.215,47.821 148.215,44.241 148.256,44.2 127.874,44.2 127.874,59.294 127.94,59.36 127.902,59.398 127.902,59.426
BAT+ on Route3 "Route2_BAT" (solid, remove dead copper, pour order 14): 144.31,59.08 144.31,48.68 142.458,48.033 133.59,46.6 133.59,44.2 142.23,44.2 145.164,47.826 146.926,47.826 146.926,59.416 146.95,59.44 146.9,59.49 144.31,59.49 144.31,59.366 144.254,59.31
VDD on Route3 "Route2_VDD" (solid, remove dead copper, pour order 12): 145.845,47.8 145.824,47.821 144.94,48.705 144.94,53.8 144.57,54.17 144.28,54.46 140.17,54.46 140.17,56.18 138.81,57.54 136.95,59.4 127.874,59.4 127.874,57.156 127.874,57.02 134.29,57.02 132.78,57.16 136.77,57.16 137.74,56.19 136.774,57.156 132.21,57.091 132.15,49.24 132.15,49.11 132.15,46.152 135.66,46.22 139.77,47.74 143.04,48.013 143.04,44.2 148.256,44.2 148.256,47.8
GND on Bottom "Top_BAT+" (solid, remove dead copper, pour order 18): 127.88,59.42 146.926,59.426 146.926,44.165 139.39,44.2 132.25,44.17 127.874,44.2

## Keep-outs
Keep-Out Layer:
  lines w0.051: 146.9,55.8 146.9,47.8 148.2,47.8 ; 146.9,55.801 148.23,55.801 ; 148.23,55.8 148.23,59.4 127.9,59.4 127.9,44.2 148.23,44.2 148.23,47.8

## Other copper
Top:
  region net BAT+: 144.379,50.331 144.82,49.89 145.23,49.89 145.23,50.1 145.76,50.1 145.936,50.1 145.936,49.87 146.66,49.87 146.66,53.09 146.27,53.09 144.37,51.19
  region net BAT+: 144.87,59.221 148.001,59.221 148.03,59.192 148.05,57.732 144.885,57.732 144.87,57.737
Route3:
  rectangle net BAT+: 144.22,57.76 147.99,59.17

## Silkscreen, mask and mechanical layers (free items; w line width, h text height)
Top Overlay:
  lines w0.051: 127.874,59.4 148.23,59.4 148.23,55.8 146.9,55.8 146.9,47.8 148.2,47.8 ; 127.902,44.174 148.23,44.174 148.23,47.8 ; 127.902,44.2 127.902,59.426
Bottom Overlay:
  text "Q14" at 235.942,31.549 h0.52 r45
Mechanical 5:
  lines w0.051: 129.2,49.9 130,49.9 ; 129.25,53.75 130,53.75 ; 129.85,50.05 130,49.9 ; 129.85,53.6 130,53.75 ; 130.15,50.05 130,49.9 ; 130.15,53.6 130,53.75 ; 130.35,49.9 130,49.9 ; 130.35,53.75 130,53.75 ; 130,49.9 130,53.75
  text "A" at 147.4,57.5 h0.52
  text "3.8" at 130.15,51.5 h0.52
  text "B" at 147.4,45.33 h0.52